# Altium PCB LED Chaser.PcbDoc
Units mm, origin at the board's own origin, x right, y up, seen from the top; angles counter-clockwise.
Board outline 65 x 66 mm, 2 copper layers (Top Layer, Bottom Layer), stack 1.1 mm thick; 19 components, 17 nets, 59 pads, 9 vias.
Unrouted connection lines stored in the file: 1.
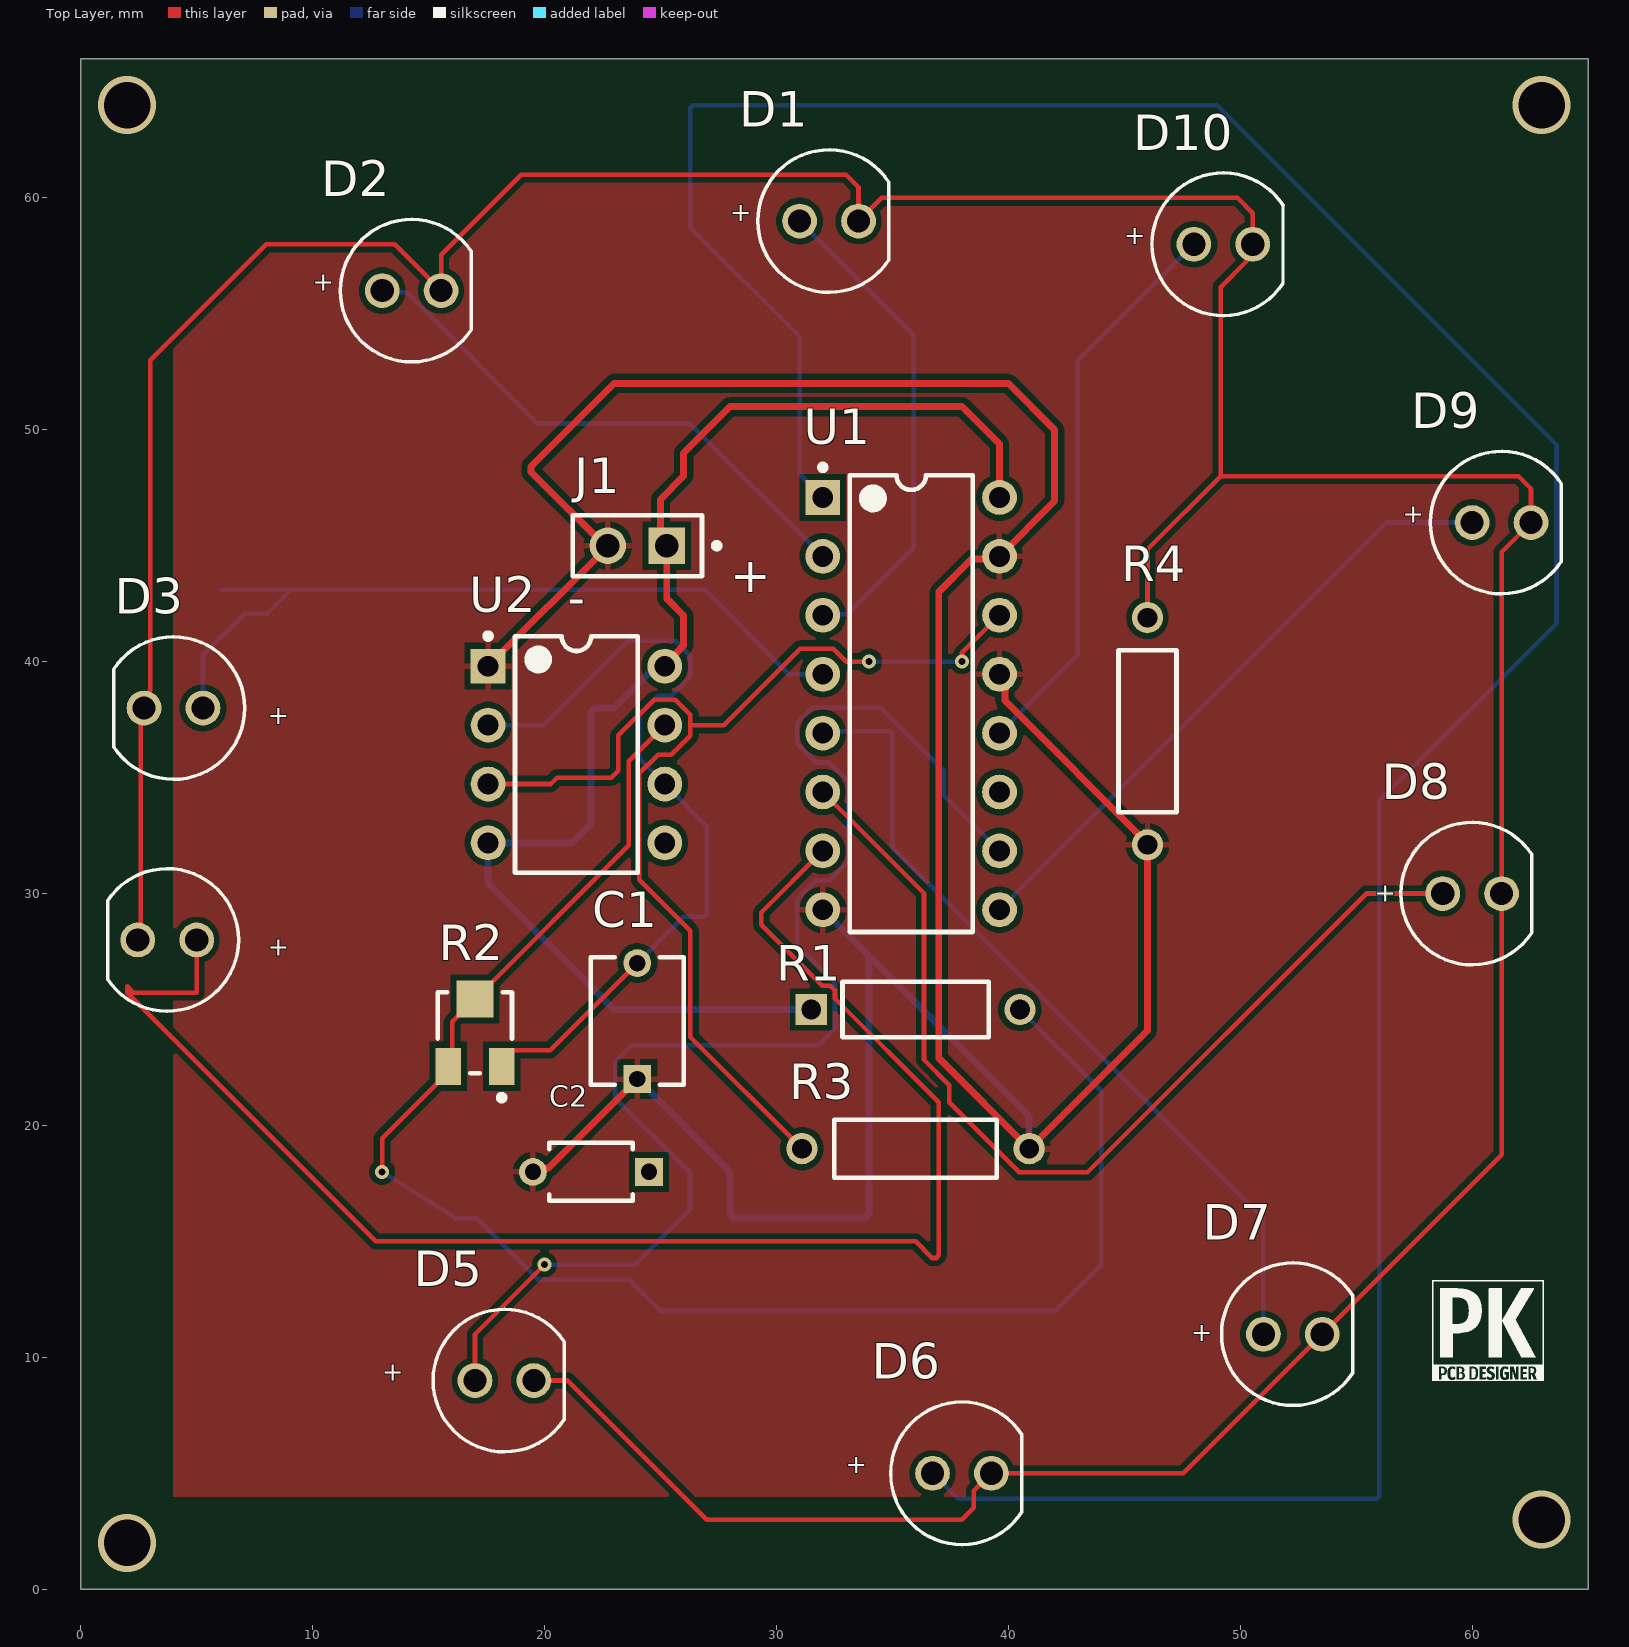
[diagram p0: Top Layer view]
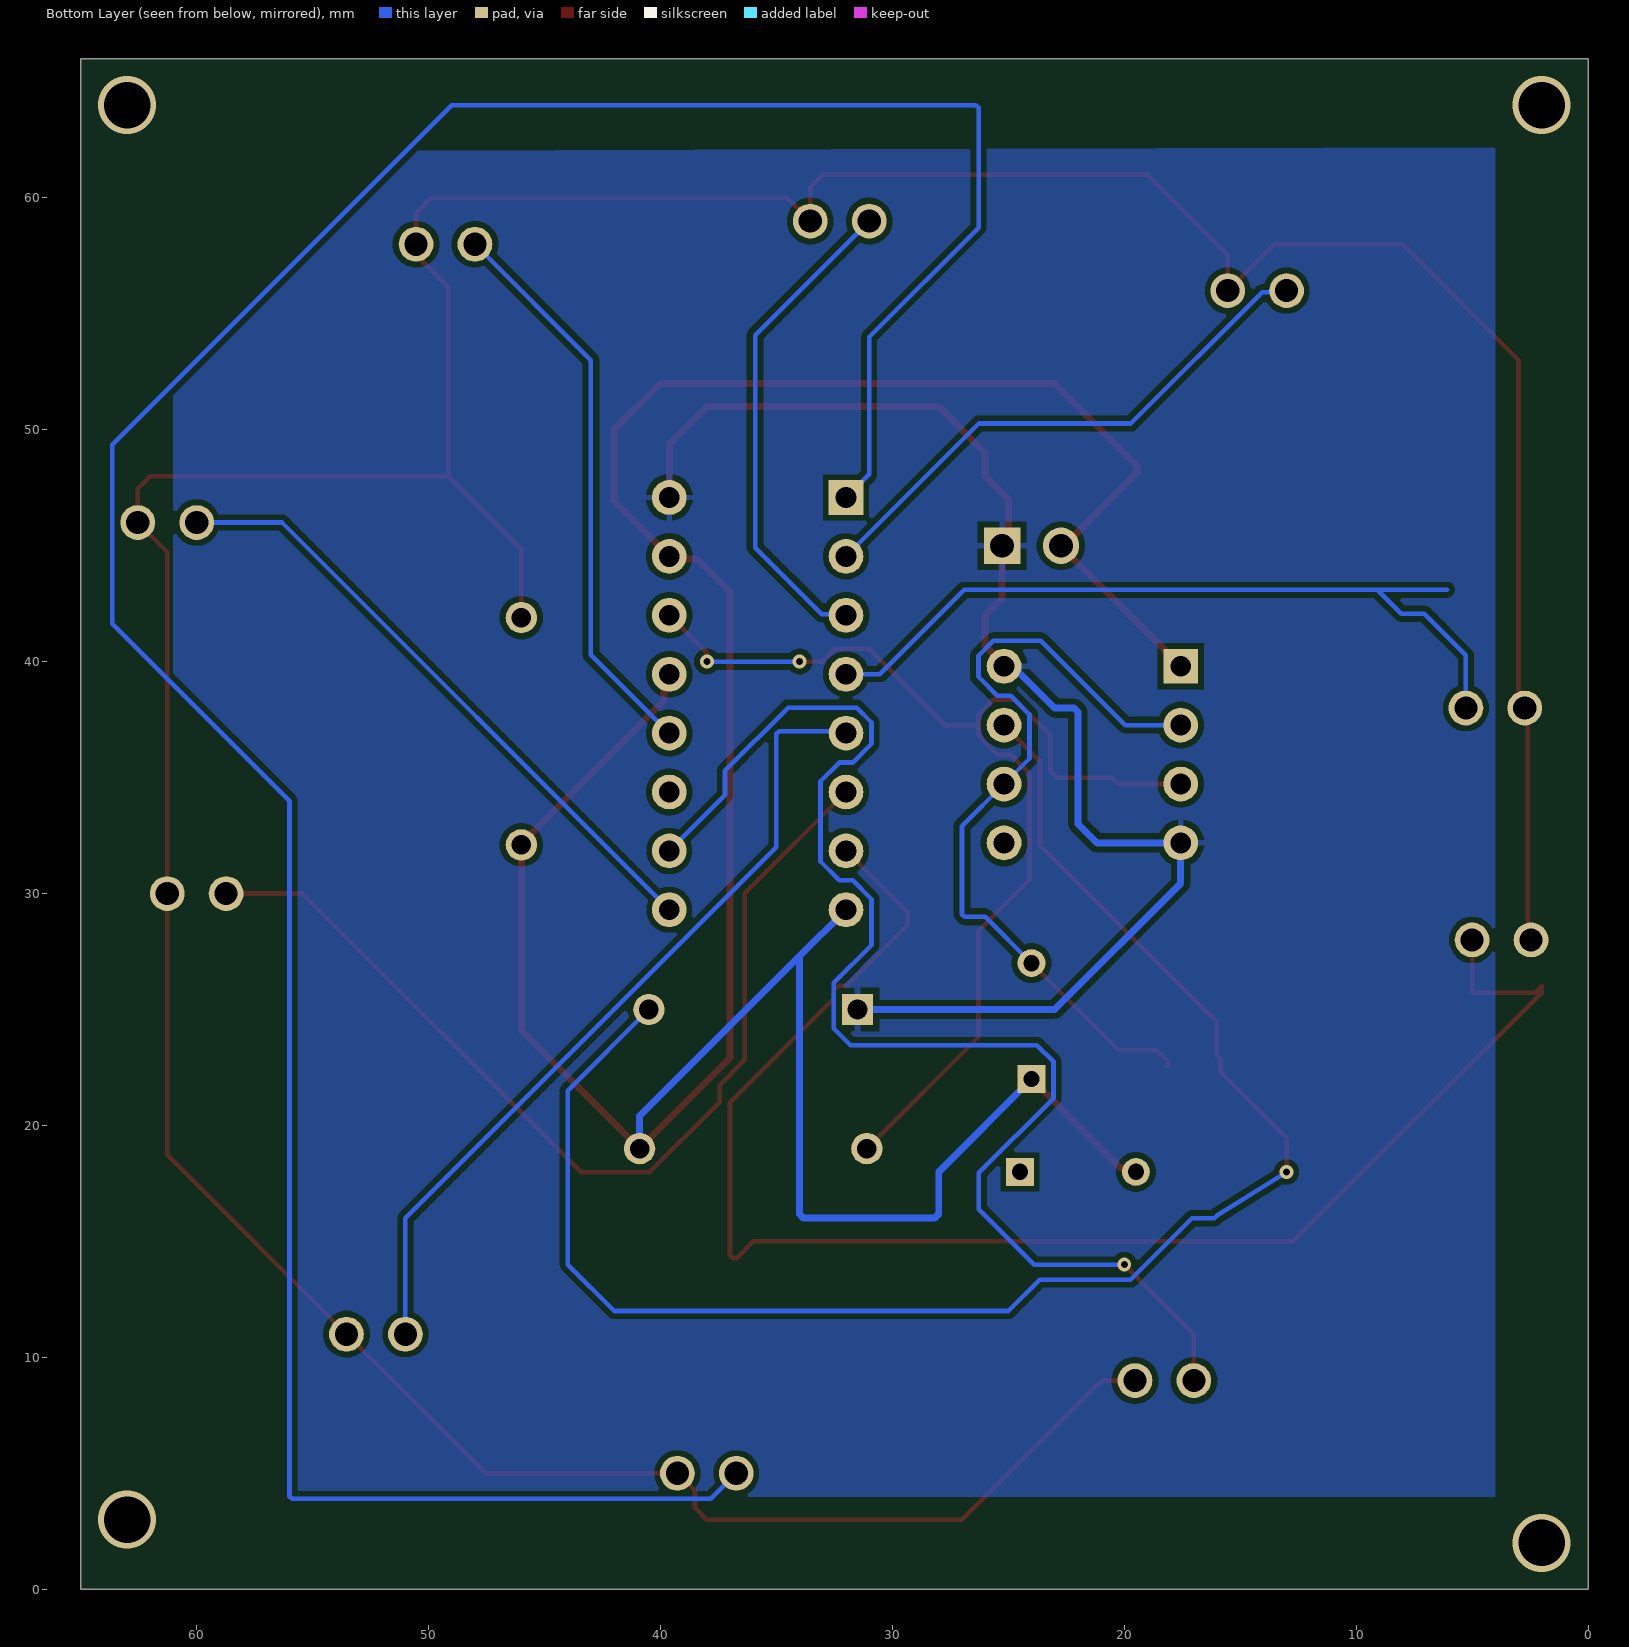
[diagram p1: Bottom Layer view, seen from below]
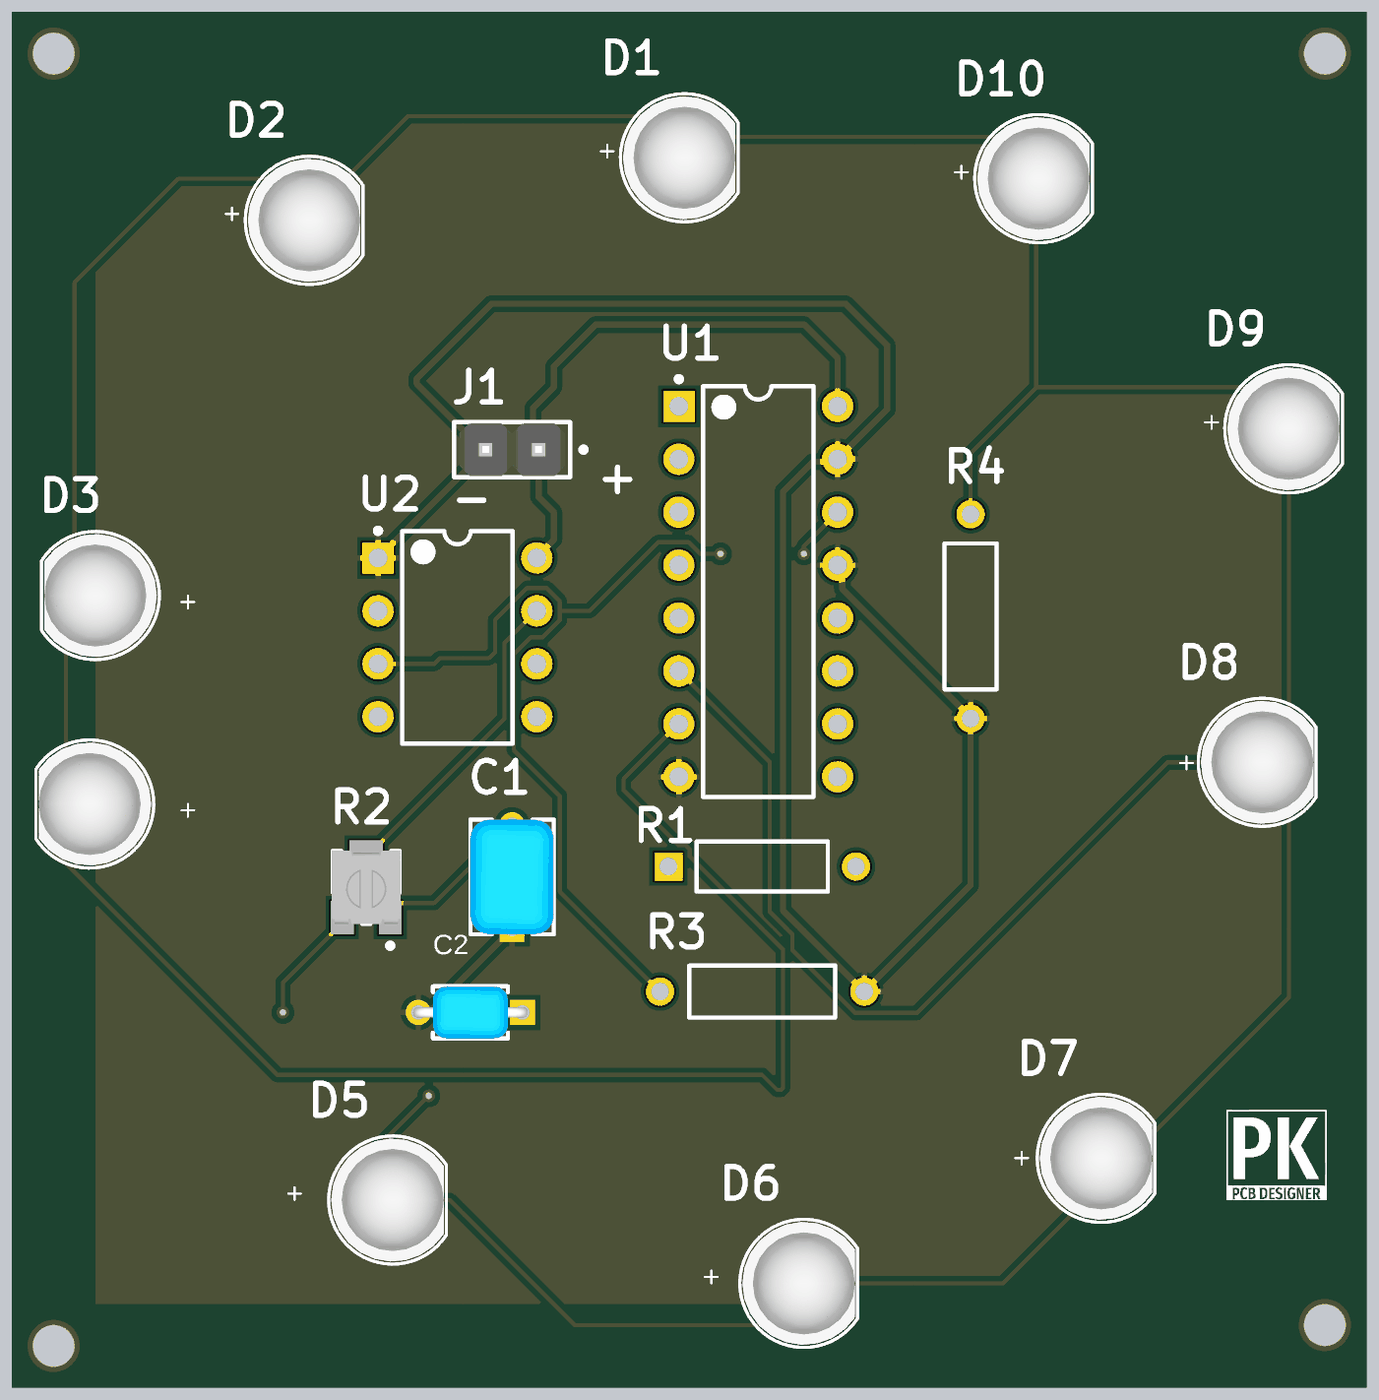
[diagram p2: 3D render of the assembled board from above, using the file's embedded part models]

## Layer stack, top to bottom
Top Solder: solder mask 0.05, SM-001, Dk 4
Top Layer: signal copper 0.1
Dielectric 1: dielectric 0.9, FR-4, Dk 4.8
Bottom Layer: signal copper 0.1
Bottom Solder: solder mask 0.05, SM-001, Dk 4

## Board outline
0,0 65,0 65,66 0,66

## Design rules (kind name [scope] priority, off if disabled: settings)
Clearance [All] p1: gap=0.25 ignorepadtopadclearanceinfootprint=FALSE
Clearance Clearance_1 [All] p2: gap=0.25 ignorepadtopadclearanceinfootprint=FALSE
PolygonConnect [All] p1: connectstyle=Relief reliefconductorwidth=0.254 reliefentries=4 polygonreliefangle="90 Angle" airgapwidth=0.254
RoutingVias [All] p1: holewidth=0.4 width=0.6 viastyle="Through Hole" minholewidth=0.4 minwidth=0.6 maxholewidth=0.4 maxwidth=0.6
SilkToSolderMaskClearance [IsPad] p1: minsilkscreentomaskgap=0.1 clearancetoexposedcopper=TRUE
SolderMaskExpansion [All] p1: expansion=0.102 istentingtop=FALSE
Width WidthPow [(InNet('VCC') OR InNet('GND'))] p1: maxlimit=0.3 minlimit=0.2 preferedwidth=0.3
Width [All] p2: maxlimit=0.2 minlimit=0.1 preferedwidth=0.2
29 further rules are at their usual default settings.

## Components (designator, comment, footprint, x,y, rotation, side; value= is the part's Value field where it differs from the comment)
C1 "RCER71E226MWM1H03A" FP-RCEWM1-MFG 24,24.5 r90 top
C2 "RCER71H103K0K1H03B" FP-RCE0K1-MFG 22,18 r180 top
D1 "151051BS04000" WL-TMRC_D5.9H8.7 32.27,59 r0 top
D2 "151051BS04000" WL-TMRC_D5.9H8.7 14.27,56 r0 top
D3 "151051BS04000" WL-TMRC_D5.9H8.7 4,38 r180 top
D4 "151051BS04000" WL-TMRC_D5.9H8.7 3.73,28 r180 top
D5 "151051BS04000" WL-TMRC_D5.9H8.7 18.27,9 r0 top
D6 "151051BS04000" WL-TMRC_D5.9H8.7 38,5 r0 top
D7 "151051BS04000" WL-TMRC_D5.9H8.7 52.27,11 r0 top
D8 "151051BS04000" WL-TMRC_D5.9H8.7 60,30 r0 top
D9 "151051BS04000" WL-TMRC_D5.9H8.7 61.27,46 r0 top
D10 "151051BS04000" WL-TMRC_D5.9H8.7 49.27,58 r0 top
J1 "M20-9990246" FP-M20-9990246-MFG 24,45 r180 top
R1 "MFR-25FBF52-1M" RESA60-630X240 36,25 r0 top
R2 "3313J-1-503E" BOUR-3313J-1_V 17,24 r90 top
R3 "OD103JE" OMTE-RES7X2.5-2 36,19 r180 top
R4 "OD103JE" OMTE-RES7X2.5-2 46,37 r90 top
U1 "CD74HC4017E" N0016A 35.81,38.19 r0 top
U2 "NE555P" P0008A 21.376,35.994 r0 top

## Footprints (in the part's own frame and the unit in brackets; to place one, negate y for a bottom-side part, rotate by r counter-clockwise, add the part's x,y. Pads: shape width x height; smd on the part's side, far side on the other; paste and mask are expansions set on the pad)
BOUR-3313J-1_V [mm] "SMD, 3-Leads, Body 3.5x3.2mm, Pitch 1.15mm"
  rect 1.6x1.1 smd paste+0: 1(-1.45,-1.15) 3(-1.45,1.15)
  rect 1.6x1.6 smd paste+0: 2(1.45,0)
  silkscreen extent -2.92,-1.6 1.75,1.6, body extent -1.75,-1.65 1.75,1.65, height 2.11
FP-M20-9990246-MFG [mm]
  rect 1.57x1.57 hole 1.02 paste-2539.97 mask+0: 1(-1.27,0)
  round 1.57 hole 1.02 paste-2539.97 mask+0: 2(1.27,0)
  silkscreen extent -3.55,-1.32 2.79,1.32, body extent -2.89,-1.42 2.89,1.42, height 0.25
FP-RCE0K1-MFG [mm]
  rect 1.2x1.2 hole 0.7 paste-2539.97 mask+0: 1(-2.5,0)
  round 1.2 hole 0.7 paste-2539.97 mask+0: 2(2.5,0)
  silkscreen extent -1.8,-1.25 1.8,1.25, body extent -3.2,-1.35 3.2,1.35, height 0.25
FP-RCEWM1-MFG [mm]
  rect 1.2x1.2 hole 0.7 paste-2539.97 mask+0: 1(-2.5,0)
  round 1.2 hole 0.7 paste-2539.97 mask+0: 2(2.5,0)
  silkscreen extent -2.75,-2 2.75,2, body extent -3.2,-2.1 3.2,2.1, height 0.25
N0016A [mm] "DIP, 16-Leads, Body 19.7x6.6mm, Pitch 2.54mm"
  rect 1.5x1.5 hole 0.9: 1(-3.81,8.89)
  round 1.5 hole 0.9: 2(-3.81,6.35) 3(-3.81,3.81) 4(-3.81,1.27) 5(-3.81,-1.27) 6(-3.81,-3.81) 7(-3.81,-6.35) 8(-3.81,-8.89) 9(3.81,-8.89) 10(3.81,-6.35) 11(3.81,-3.81) 12(3.81,-1.27) 13(3.81,1.27) 14(3.81,3.81) 15(3.81,6.35) 16(3.81,8.89)
  silkscreen extent -3.93,-9.85 2.65,10.31, body extent -3.95,-9.85 3.95,9.85, height 5.08
OMTE-RES7X2.5-2 [mm] "Resistor, Axial; Body 7x2.5mm, Lead Dia. 0.6mm"
  round 1.35 hole 0.85: 1(-4.9,0) 2(4.9,0)
  silkscreen extent -3.5,-1.25 3.5,1.25, body extent -3.5,-1.25 3.5,1.25, height 2.5
P0008A [mm] "DIP, 8-Leads, Body 10.15x6.6mm, Pitch 2.54mm"
  rect 1.5x1.5 hole 0.9: 1(-3.81,3.81)
  round 1.5 hole 0.9: 2(-3.81,1.27) 3(-3.81,-1.27) 4(-3.81,-3.81) 5(3.81,-3.81) 6(3.81,-1.27) 7(3.81,1.27) 8(3.81,3.81)
  silkscreen extent -3.93,-5.1 2.65,5.23, body extent -3.95,-5.07 3.95,5.07, height 5.08
RESA60-630X240 [mm] "Axial Resistor, 2-Leads, Dia 2.4mm, Body Length 6.3mm"
  rect 1.35x1.35 hole 0.85: 1(-4.5,0)
  round 1.35 hole 0.85: 2(4.5,0)
  silkscreen extent -3.15,-1.2 3.15,1.2, body extent -3.15,-1.2 3.15,1.2, height 2.4
WL-TMRC_D5.9H8.7 [mm] "THT Mono-color Round Color LED, 2-leads"
  round 1.5 hole 1: 1(-1.27,0) 2(1.27,0)
  silkscreen extent -3.07,-3.07 2.58,3.08, body extent -2.95,-2.95 2.45,2.95, height 9.2

## Part data
C1: library part CMP-06035-003622-1, "CAP CER 22UF 25V X7R RADIAL", Capacitance=22uF, Case/Package=Radial, Dielectric=X7R, Max Operating Temperature=125°C, Min Operating Temperature=-55°C, Package Quantity=1500, Ratings=AEC-Q200, Resistor Type=Ceramic, Tolerance=20%, Voltage Rating=25V, Height=7.5mm, Height - Seated (Max)=0.295inch, Lead Diameter=0.5mm, Lead Pitch=0.197inch, Lead/Base Style="Formed Leads", Length=0.217inch, Mount="Through Hole", Packaging="Tape and Reel", Termination=Radial, Voltage Rating (DC)=25V, Width=0.157inch
C2: library part CMP-06035-044411-1, "Cap Ceramic 10nF 50V X7R ±10% Radial 5mm +125°C Automotive Bulk", Capacitance=10nF, Case/Package=Radial, Dielectric=X7R, Max Operating Temperature=125°C, Min Operating Temperature=-55°C, Package Quantity=500, Ratings=AEC-Q200, Resistor Type=Ceramic, Tolerance=10%, Voltage Rating=50V, Height=3.5mm, Height - Seated (Max)=0.138inch, Lead Diameter=0.5mm, Lead Free="Lead Free", Lead Pitch=0.197inch, Lead/Base Style="Formed Leads", Length=0.142inch, Mount="Through Hole", Packaging=Bulk, Termination=Radial, Voltage Rating (DC)=50V, Width=0.098inch
D1 D2 D3 D4 D5 D6 D7 D8 D9 D10: library part CMP-1488-00009-2, Case/Package=Radial, Color=Blue, Forward Current=100mA, Forward Voltage=3.2V, Max Operating Temperature=85°C, Max Reverse Voltage (DC)=5V, Min Operating Temperature=-40°C, Test Current=20mA, Dominant Wavelength=470nm, Height=8.6mm, Length=5mm, Lens Size=5mm, Lens Style="Circular, Diffused, Round", Luminous Intensity=500mcd, Mount="Through Hole", NexarPartId=29717812, Packaging=Bulk, Peak Wavelength=465nm, REACH SVHC=Unknown, RoHS=Compliant, Viewing Angle=40°, Wavelength=470nm, Width=5mm
J1: library part CMP-15831-000009-1, "CONN HEADER VERT 2POS 2.54MM", Current Rating=3A, Manufacturer=Harwin, Temperature="-40°C to +105°C", Temperature Range High=+105°C, Temperature Range Low=-40°C, Automotive=No, Category=Conn, ComponentLink2Description=Datasheet, ComponentLink2URL=https://cdn.harwin.com/pdfs/M20-999.pdf, Conn Gender=Male, Conn Orientation=Vertical, Contact Material=Tin,Nickel, Device Class L1=Connectors, Device Class L2="Headers and Wire Housings", Device Class L3=unset, Digikey Description="CONN HEADER VERT 2POS 2.54MM", Height=8.99mm, Lead Free=Yes, Manufacturer Part Number=M20-9990246, Mouser Description="2.54mm (0.1\") Pitch SIL Vertical PC Tail Pin Header, 6.1mm mating pin height, tin, 2 contacts", Number Of Contacts=2, Number Of Rows=1, Octopart=https://octopart.com/m20-9990246-harwin-2590635, Package=M20-9990246, Pitch=2.54mm, RoHS=TRUE
R1: library part CMP-1659-00070-1, "Axial Resistor, 1 MOhm, +/- 1%, 250 mW, -55 to 155 degC, 2-Pin THD, RoHS, Bulk", Case\Package=Axial, Max Operating Temperature="155 degC", Min Operating Temperature="-55 degC", Package Quantity=200, Power Rating="250 mW", Resistance="1 M Ohm", Tolerance=1%, Voltage Rating="250 V", ComponentLink1Description="Manufacturer URL", ComponentLink1URL=http://www.yageo.com/, ComponentLink2Description=Datasheet, ComponentLink2URL=http://www.yageo.com/documents/recent/Yageo%20LR_MFR_2013.pdf, DatasheetVersion=Apr-13, Length="0.248 inch", Mount="Through Hole", PackageDescription="2-Pin Axial Lead, Dia 2.4 mm, Body Length 6.3 mm", PackageReference=MFR-25, Packaging=Bulk, RoHSCompliant=true
R2: library part CMP-2000-05588-1, "3 mm Trimpot(R) Trimming Potentiometer, 50 KOhm, +/- 20%, 0.125 W, -55 to 125 degC, 3-Pin SMD, RoHS, Tape and Reel", Manufacturer=Bourns, Package Description="3-Pin Surface Mount Device, Body 3.5 x 3.2 mm, Pitch 1.15 mm", Package Reference=3313J-1, Power Rating=125mW, Resistance Tolerance=±20%, Temperature Coefficient=±150ppm/°C, Track Resistance=50kohm, Datasheet URL=http://www.bourns.com/docs/Product-Datasheets/3313.pdf, Datasheet Version=05/2016, Manufacturer URL=http://www.bourns.com/, Mounting Technology=SurfaceMount, No. of Turns=1, Potentiometer Mounting=SMD, SVHC=NoSVHC(19-Dec-2012)
R3: library part CMP-2000-06865-1, "Little Demon(R) Carbon Composition Molded OD Series, 250 V, 10 KOhm, +/-5%, -70 to 130 degC, 2-Pin THD, RoHS, Bulk", Manufacturer=Ohmite, Operating Temperature=-, Package / Case=Axial, Package Description="2-Pin THD Resistor, Body 7 x 2.5 mm, Lead Dia. 0.6 mm", Package Reference=RES7X2.5, Power (Watts)=0.25W,1/4W, Power Rating=0.25W, Resistance (Ohms)=10k, Standard Package=100, Tolerance=±5%, Catalog Drawings=OD,OF,OASeries, Category=Resistors, Composition=CarbonComposition, Datasheet URL=http://www.ohmite.com/cat/res_od_of_oa.pdf, Datasheet Version=06/2016, EDA / CAD Models=DownloadfromAcceleratedDesigns, Family=ThroughHoleResistors, Features=PulseWithstanding, Height=-, Manufacturer URL=http://www.ohmite.com/, Mounting Technology=ThroughHole, Number of Terminations=2, Online Catalog=OD,OF,OASeries,LittleDemon®, Packaging=Bulk, PartNumber=OD103JE, RoHS Information="LittleDemon\"E\"SeriesMaterialDeclaration", Series=LittleDemon®OD, Size / Dimension="0.098\"Diax0.276\"L(2.50mmx7.00mm)", Supplier Device Package=Axial, Temperature Coefficient=-
R4: library part CMP-2000-06865-1, "Little Demon(R) Carbon Composition Molded OD Series, 250 V, 10 KOhm, +/-5%, -70 to 130 degC, 2-Pin THD, RoHS, Bulk", Manufacturer=Ohmite, Operating Temperature=-, Package / Case=Axial, Package Description="2-Pin THD Resistor, Body 7 x 2.5 mm, Lead Dia. 0.6 mm", Package Reference=RES7X2.5, Power (Watts)=0.25W,1/4W, Power Rating=0.25W, Resistance (Ohms)=120ohms, Standard Package=100, Tolerance=±5%, Catalog Drawings=OD,OF,OASeries, Category=Resistors, Composition=CarbonComposition, Datasheet URL=http://www.ohmite.com/cat/res_od_of_oa.pdf, Datasheet Version=06/2016, EDA / CAD Models=DownloadfromAcceleratedDesigns, Family=ThroughHoleResistors, Features=PulseWithstanding, Height=-, Manufacturer URL=http://www.ohmite.com/, Mounting Technology=ThroughHole, Number of Terminations=2, Online Catalog=OD,OF,OASeries,LittleDemon®, Packaging=Bulk, PartNumber=OD103JE, RoHS Information="LittleDemon\"E\"SeriesMaterialDeclaration", Series=LittleDemon®OD, Size / Dimension="0.098\"Diax0.276\"L(2.50mmx7.00mm)", Supplier Device Package=Axial, Temperature Coefficient=-
U1: library part CMP-1623-00548-2, "High Speed CMOS Logic Decade Counter/Divider with 10 Decoded Outputs, N0016A, TUBE", F @ Nom Voltage(Max)(Mhz)=28, Generic Part Number=CD74HC4017, ICC @ Nom Voltage(Max)(mA)=0.08, Manufacturer="Texas Instruments", Operating Temperature Range(C)="-55 to 125", Rating=Catalog, tpd @ Nom Voltage(Max)(ns)=54, Voltage(Nom)(V)=3.3,5, Bits(#)=10, Code_JEDEC=MS-001, DatasheetVersion=SCHS200D, Function=Counter, Input Type=LVTTL/CMOS, Inputs=1, Output Drive (IOL/IOH)(Max)(mA)=5.2/-5.2, Output Type=CMOS, PackageReference=N0016A, Schmitt Trigger=No, Technology Family=HC, Type=Decade, VCC(Max)(V)=6, VCC(Min)(V)=2
U2: library part CMP-2000-04954-1, "Precision Timer, 4.5 to 16 V, 0 to 70 degC, 8-Pin DIP, Pb-Free, Tube", Manufacturer=TexasInstruments, Maximum High Level Output Current=-200mA, Maximum Low Level Output Current=200mA, Operating Supply Voltage=5, Package=8PDIP, Package Description="8-Pin Double In-line Package, Body 9.59 x 6.35 mm, Pitch 2.54 mm", Package Reference=P8, Category=Timer, Datasheet URL=http://www.ti.com/general/docs/lit/getliterature.tsp?genericPartNumber=NE555&fileType=pdf, Datasheet Version="Rev. I, 09/2014", Manufacturer URL=http://www.ti.com/, Number of Internal Timers=1, Package URL=http://www.ti.com/lit/ml/mpdi001b/mpdi001b.pdf, Packaging=Rail/Tube, Rad Hard=No, Type=Standard

## Via types
v1: diameter 0.6, hole 0.3, Top Layer to Bottom Layer, tented both sides, 4 vias
v2: diameter 2.5, hole 2, Top Layer to Bottom Layer, tented both sides, 4 vias
v3: diameter 0.5, hole 0.4, Top Layer to Bottom Layer, tented both sides, 1 vias

## Nets (pads, with @x,y where several pads share a name; then routed paths per layer and width w, separated by ;. In a path a pad name is that pad's centre, name@x,y a point inside that pad or via, vN(x,y) a via of type N, cw(c..) or ccw(c..) an arc to the next point about the centre after c; other vN are vias at no path point)
GND: C1.1 C2.2 J1.2 R3.1 R4.1 U1.8 U1.13 U1.15 U2.1 | length 142.6
  Top Layer w0.3: U2.1 22.73,44.968 J1.2 22.6,45 19.424,48.176 19.424,48.424 23,52 40,52 42,50 42,46.92 U1.15 39.5,44.42 38.42,44.42 37,43 37,22.9 R3.1 41,19 41,19.1 46,24.1 R4.1 46,32.166 39.85,38.317 39.85,39.23 U1.13 ; C2.2 19.672,18.172 20.172,18.172 v3(24,22)
  Bottom Layer w0.3: v3(24,22) 28,18 28,16.176 28.176,16 33.824,16 34,16.176 34,27.3 ; U1.8 34,27.3 ; R3.1 40.9,20.4 34,27.3
NetC1_2: C1.2 R2.1 U2.2 U2.6 | length 35.8
  Top Layer w0.2: R2.1 18.15,22.8 18.6,23.25 20.25,23.25 C1.2
  Bottom Layer w0.2: U2.2 19.96,37.264 23.6,40.904 25.642,40.904 26.286,40.26 26.286,39.348 25.472,38.534 24.9,38.534 24.086,37.72 24.086,35.824 U2.6 27,32.91 27,29.117 26.883,29 26,29 C1.2
NetC2_1: C2.1 U2.5
NetD1_1: D1.1 U1.3 | length 21.2
  Bottom Layer w0.2: D1.1 35.917,54.083 35.917,44.917 33.05,42.05 32.05,42.05 U1.3
NetD1_2: D1.2 D2.2 D3.2 D4.2 D5.2 D6.2 D7.2 D8.2 D9.2 D10.2 R4.2 | length 195.6
  Top Layer w0.2: D4.2 2.595,28.135 2.595,37.865 D3.2 ; D3.2@3,37.7 2.979,37.721 2.979,38.746 3,38.767 3,53 8,58 13.54,58 D2.2 15.54,57.54 19,61 33,61 33.54,60.46 D1.2 34.54,60 49.883,60 50.54,59.343 D10.2 D10.2@50.892,58 ; D5.2 21,9 27,3 38,3 38.511,3.511 38.511,4.241 D6.2 47.54,5 D7.2 61.27,18.73 D8.2 61.27,44.73 D9.2 62.54,47.46 62,48 49.155,48 ; R4.2 46,44.845 49.155,48 ; D10.2@51,58 D10.2@50.892,58 ; 49.155,48 49.155,56.155 50.291,57.291 50.291,57.399 D10.2@50.892,58
  Bottom Layer w0.2: D2.2 D2.2@16,56
NetD2_1: D2.1 U1.2 | length 23.7
  Bottom Layer w0.2: D2.1 13.066,55.934 14.05,55.934 19.714,50.27 26.27,50.27 U1.2
NetD3_1: D3.1 U1.4 | length 34.7
  Bottom Layer w0.2: D3.1 5.27,40.27 7.066,42.066 8.05,42.066 9.084,43.1 ; 6.084,43.1 9.084,43.1 ; U1.4 30.54,39.46 26.9,43.1 9.084,43.1
NetD4_1: D4.1 U1.7 | length 67.2
  Top Layer w0.2: 2,25.865 2,25.73 12.73,15 36,15 36.717,14.283 36.883,14.283 37,14.4 37,21 32.525,25.475 32.525,25.82 32.32,26.025 31.975,26.025 29.345,28.655 29.345,29.185 U1.7 ; 2,26 2.27,25.73 5,25.73 D4.1
NetD5_1: D5.1 U1.10 | length 59.8
  Top Layer w0.2: D5.1 17,11 v1(20,14)
  Bottom Layer w0.2: v1(20,14) 23.884,14 26.275,16.392 26.275,17.956 23.05,21.181 23.05,22.745 23.768,23.463 31.807,23.463 32.525,24.18 32.525,26.155 30.9,27.78 30.9,29.756 31.714,30.57 32.286,30.57 33.1,31.384 33.1,34.836 32.286,35.65 31.714,35.65 30.9,36.464 30.9,37.376 31.544,38.02 34.499,38.02 37.22,35.299 37.22,34.24 U1.10
NetD6_1: D6.1 U1.1 | length 130.9
  Bottom Layer w0.2: U1.1 31,48.08 31,54 26.283,58.717 26.283,63.883 26.4,64 49,64 63.64,49.36 63.64,41.64 56,34 56,4.017 55.883,3.9 37.83,3.9 D6.1
NetD7_1: D7.1 U1.5 | length 35.6
  Bottom Layer w0.2: U1.5 32.08,37 34.883,37 35,36.883 35,32 51,16 D7.1
NetD8_1: D8.1 U1.6 | length 43.2
  Top Layer w0.2: U1.6 36.362,30.018 36.362,22.831 37.45,21.743 37.45,21 40.475,17.975 43.414,17.975 55.439,30 D8.1
NetD9_1: D9.1 U1.9 | length 27.3
  Bottom Layer w0.2: U1.9 56.32,46 D9.1
NetD10_1: D10.1 U1.12 | length 24.6
  Bottom Layer w0.2: U1.12 43,40.3 43,53 D10.1
NetR1_2: R1.2 R2.2 R2.3 U2.7 | length 70.8
  Top Layer w0.2: v1(13,18) 13,19.45 15.85,22.3 R2.3 15.85,22.85 16.017,23.017 16.017,24.467 R2.2 23.636,32.086 23.636,35.714 U2.7
  Bottom Layer w0.2: v1(13,18) 16,16.117 16.117,16 17.081,16 19.731,13.35 23.65,13.35 25,12 42,12 44,14 44,21.5 R1.2
NetR3_2: R3.2 U1.14 U2.3 | length 50.3
  Top Layer w0.2: U2.3 20.262,34.724 20.538,35 22.883,35 23.186,35.303 23.186,36.82 24.73,38.364 25.642,38.364 26.286,37.72 26.286,37.264 ; R3.2 31,19 31,19.1 26.286,23.814 26.286,28.397 24.086,30.597 24.086,35.18 24.9,35.994 25.472,35.994 26.286,36.808 26.286,37.264 ; v1(34,40) 33.016,40 32.456,40.56 31.019,40.56 27.723,37.264 26.286,37.264 ; v1(38,40) 38,40.38 U1.14
  Bottom Layer w0.2: v1(34,40) v1(38,40)
VCC: J1.1 R1.1 U1.16 U2.4 U2.8 | length 59.5
  Top Layer w0.3: U2.8 25.186,39.873 26,40.687 26,42 25.27,42.73 J1.1 25,45.27 25,47 26,48 26,49 28,51 38,51 39.62,49.38 U1.16
  Bottom Layer w0.3: U2.8 25.186,39.814 25,40 25,39.943 24.632,39.574 24.574,39.574 23,38 22.176,38 22,37.824 22,33 21.184,32.184 U2.4 17.566,30.434 23,25 R1.1
pads on no net: U1.11
copper on no net:
  other v2: 2,2 63,3 2,64 63,64

## Polygon pours and split planes (outlines as drawn)
GND on Top Layer "GND_L01_P000" (solid, remove dead copper, pour order 0): 4,61 4,4 62,4 62,61
VCC on Bottom Layer "VCC_L02_P002" (solid, remove dead copper, pour order 2): 4,62.188 4,4 61,4 61,62

## Silkscreen, mask and mechanical layers (free items; w line width, h text height)
Top Overlay:
  drawing of 9 lines, arcs and shapes, not listed
  text "+" at 28,43 h1.52
  text "-" at 21,42 h1.52

## Text inside footprints (layer, text, board x,y; h text height)
D1: Top Overlay "+" at 28,59 h0.8
D2: Top Overlay "+" at 10,56 h0.8
D3: Top Overlay "+" at 9,38 h0.8 r180
D4: Top Overlay "+" at 9,28 h0.8 r180
D5: Top Overlay "+" at 13,9 h0.8
D6: Top Overlay "+" at 33,5 h0.8
D7: Top Overlay "+" at 47.888,10.703 h0.8
D8: Top Overlay "+" at 55.799,29.657 h0.8
D9: Top Overlay "+" at 57,46 h0.8
D10: Top Overlay "+" at 45,58 h0.8